# Altium PCB IR Sensors.PcbDoc
Units mm, origin at the board's own origin, x right, y up, seen from the top; angles counter-clockwise.
Board outline 45.75 x 75 mm, 2 copper layers (Top Layer, Bottom Layer); 24 components, 116 nets, 71 pads, 0 vias.
Unrouted connection lines stored in the file: 12.
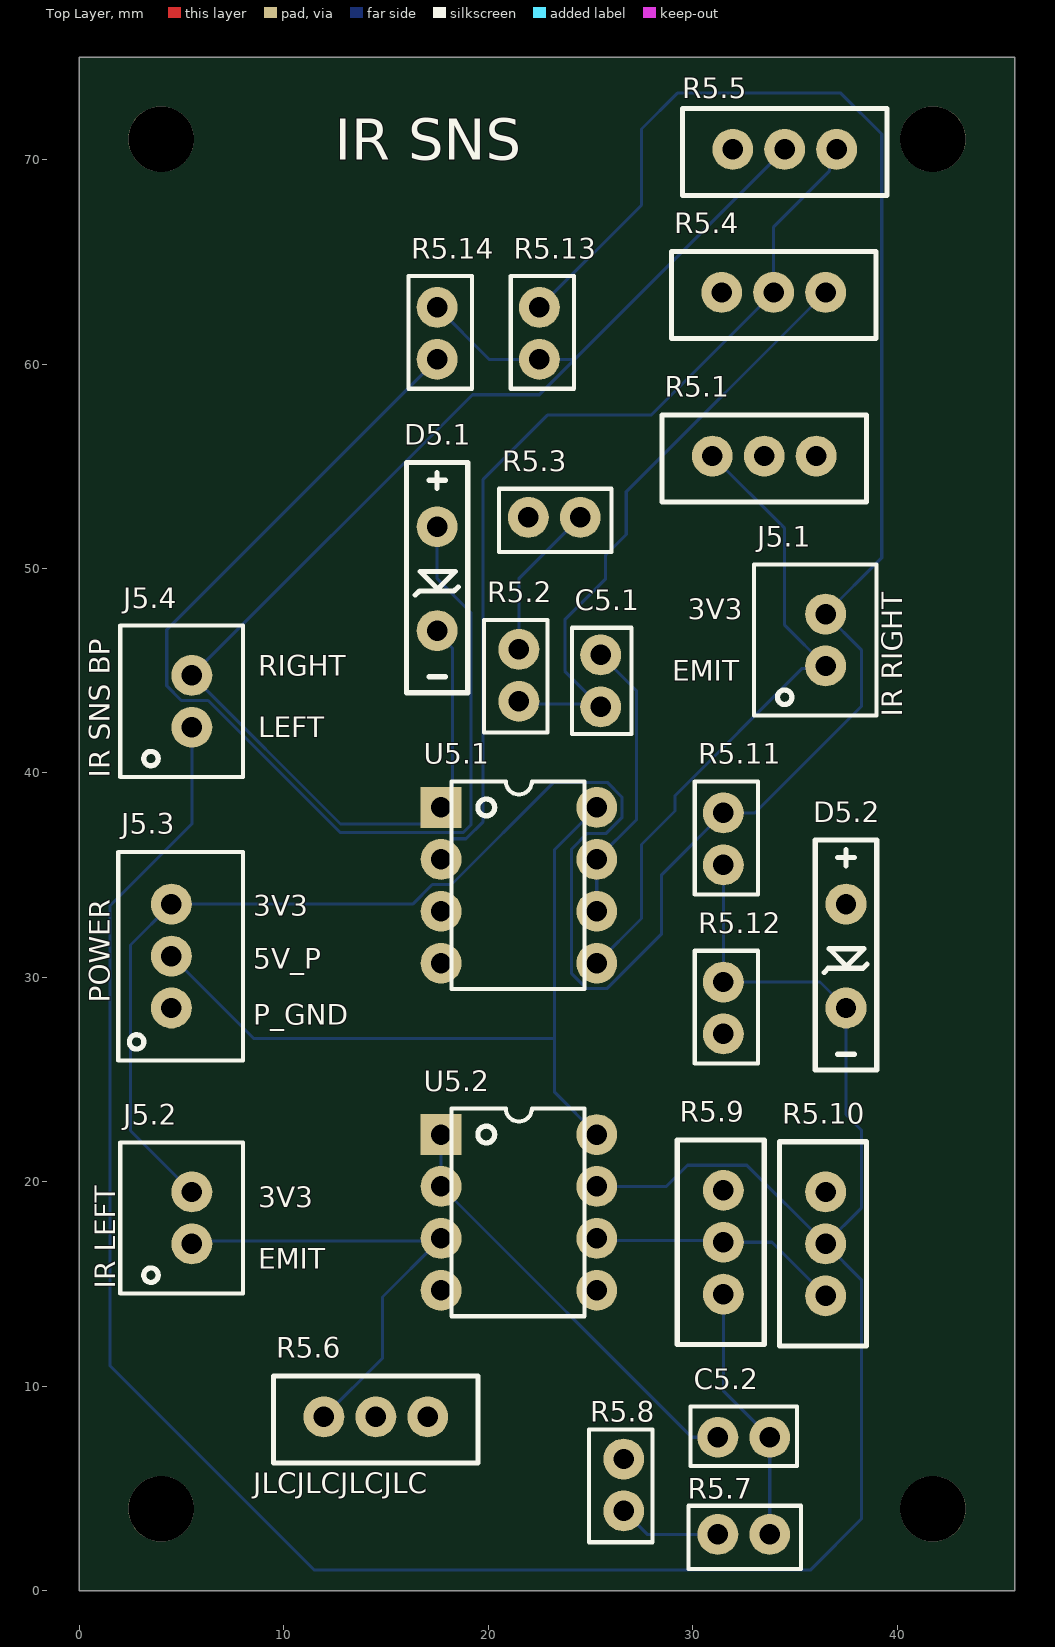
[diagram p0: Top Layer view]
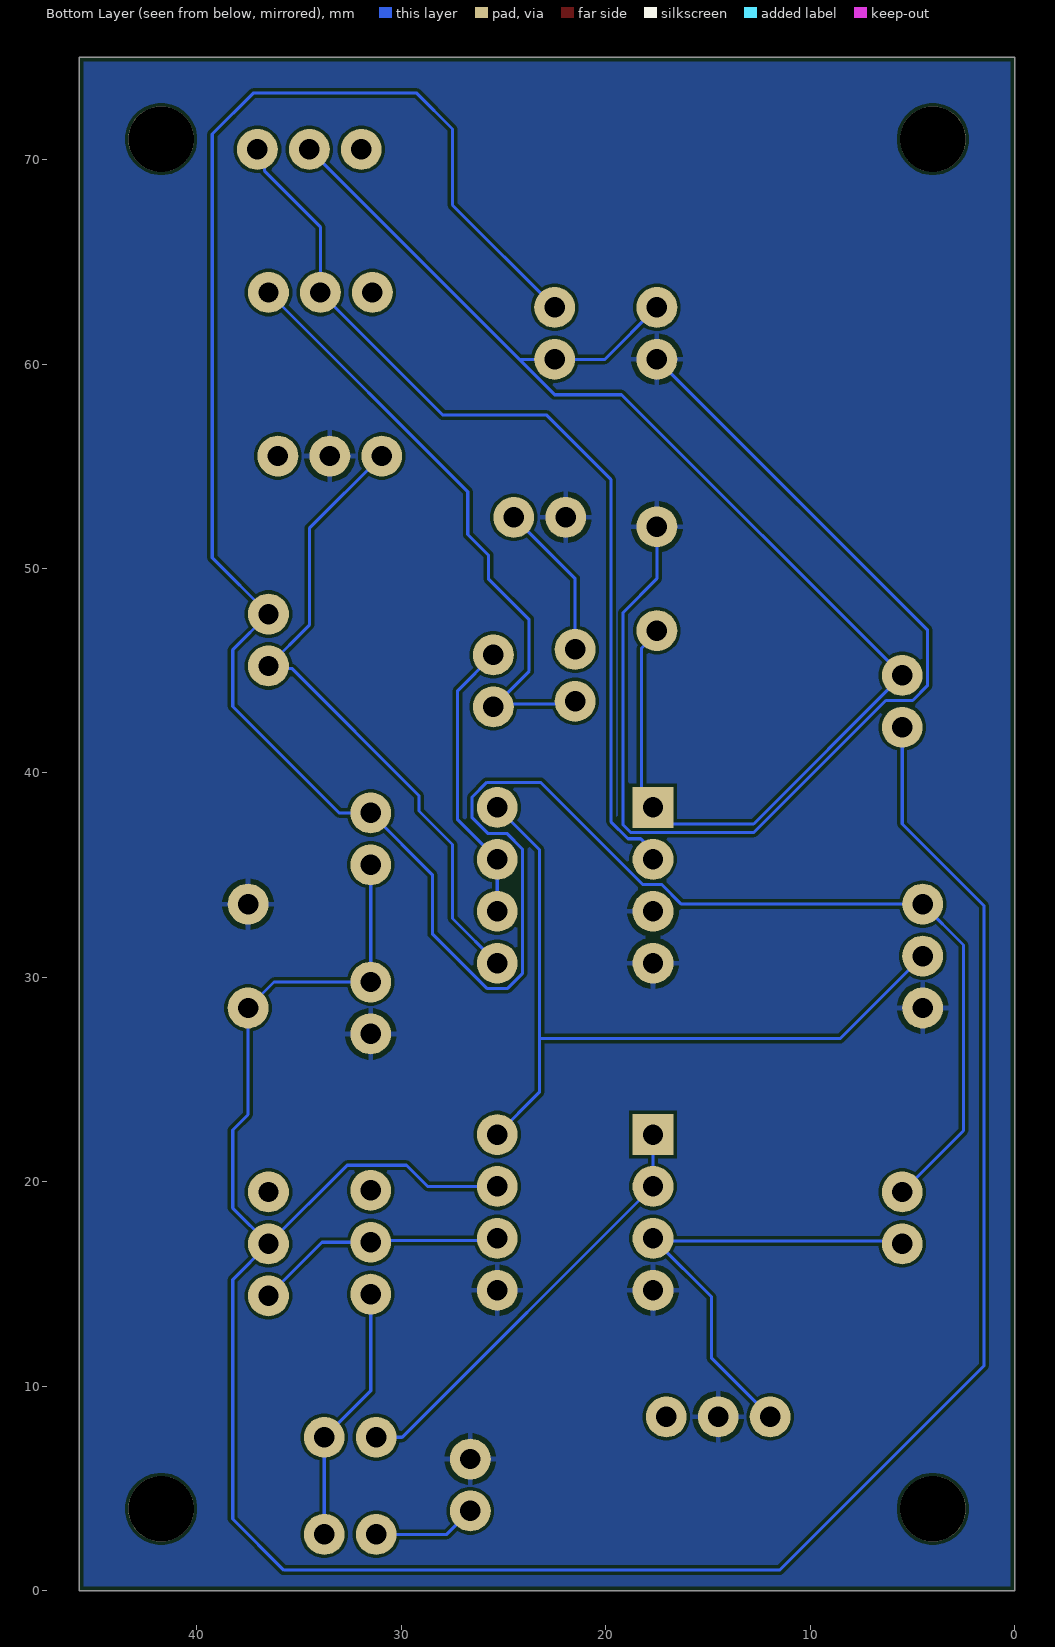
[diagram p1: Bottom Layer view, seen from below]
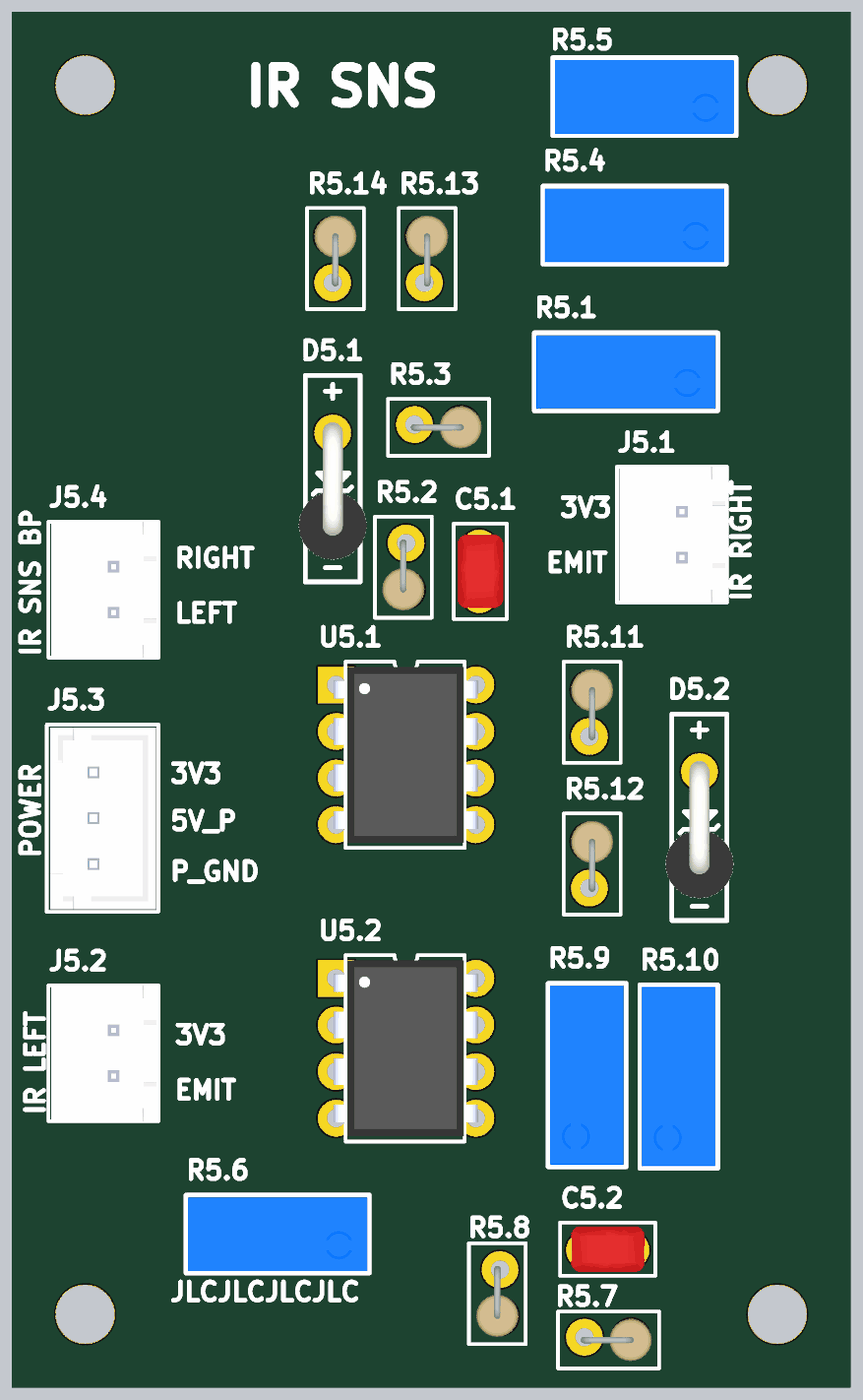
[diagram p2: 3D render of the assembled board from above, using the file's embedded part models]

## Layer stack, top to bottom
Top Solder: solder mask 0.0102, Solder Resist, Dk 3.5
Top Layer: signal copper 0.0356
Dielectric 1: dielectric 0.32, FR-4, Dk 4.8
Bottom Layer: signal copper 0.0356
Bottom Solder: solder mask 0.0102, Solder Resist, Dk 3.5

## Board outline
0,0 0,75 45.75,75 45.75,0

## Design rules (kind name [scope] priority, off if disabled: settings)
BoardOutlineClearance [All] p1: gap=0.2 ignorepadtopadclearanceinfootprint=FALSE
Clearance [All] p1: gap=0.152 ignorepadtopadclearanceinfootprint=FALSE
HoleSize [All] p1: absolutevalues=TRUE maxlimit=100 minlimit=0.4 maxpercent=80.000 minpercent=20.000
PolygonConnect [All] p1: connectstyle=Relief reliefconductorwidth=0.254 reliefentries=4 polygonreliefangle="90 Angle" airgapwidth=0.254
RoutingVias [All] p1: holewidth=0.4 width=0.8 viastyle="Through Hole" minholewidth=0.4 minwidth=0.6 maxholewidth=100 maxwidth=100
SilkToSilkClearance [All] p1: silktosilkclearance=0
SilkToSolderMaskClearance [IsPad] p1: minsilkscreentomaskgap=0 clearancetoexposedcopper=TRUE
SolderMaskExpansion [All] p1: expansion=0.102 istentingtop=FALSE
Width [All] p1: maxlimit=100 minlimit=0.152 preferedwidth=0.152
27 further rules are at their usual default settings.

## Components (designator, comment, footprint, x,y, rotation, side; value= is the part's Value field where it differs from the comment)
C5.1 "470n" "Non Polarized Cap" 25.5,44.5 r270 top
C5.2 "470n" "Non Polarized Cap" 32.5,7.5 r0 top
D5.1 "3.3V" "Zener Generic" 17.5,49.5 r270 top
D5.2 "3.3V" "Zener Generic" 37.5,31.04 r270 top
J5.1 "IR Right" "2pos JST" 36.5,46.5 r90 top
J5.2 "IR Left" "2pos JST" 5.5,18.23 r90 top
J5.3 "Power" "3pos JST" 4.5,31.04 r90 top
J5.4 "IR BP Out" "2pos JST" 5.5,43.5 r90 top
R5.1 "100k" "Pot Generic" 33.5,55.5 r180 top
R5.2 "100" Res_Generic 21.5,44.77 r270 top
R5.3 "100" Res_Generic 23.23,52.5 r0 top
R5.4 "10k" "Pot Generic" 33.96,63.5 r180 top
R5.5 "100k" "Pot Generic" 34.5,70.5 r180 top
R5.6 "100k" "Pot Generic" 14.5,8.5 r180 top
R5.7 "100" Res_Generic 32.5,2.75 r0 top
R5.8 "100" Res_Generic 26.627,5.167 r270 top
R5.9 "10k" "Pot Generic" 31.5,17.04 r90 top
R5.10 "100k" "Pot Generic" 36.5,16.96 r90 top
R5.11 "Res_Generic" Res_Generic 31.5,36.77 r90 top
R5.12 "Res_Generic" Res_Generic 31.5,28.5 r90 top
R5.13 "Res_Generic" Res_Generic 22.5,61.5 r90 top
R5.14 "Res_Generic" Res_Generic 17.5,61.5 r90 top
U5.1 "TL082IP" DIP8 21.5,34.5 r0 top
U5.2 "TL082IP" DIP8 21.5,18.5 r0 top

## Footprints (in the part's own frame and the unit in brackets; to place one, negate y for a bottom-side part, rotate by r counter-clockwise, add the part's x,y. Pads: shape width x height; smd on the part's side, far side on the other; paste and mask are expansions set on the pad)
"2pos JST" [mm]
  round 2 hole 1: 1(-1.27,0) 2(1.27,0)
  silkscreen extent -3.7,-2.5 3.7,3.5, body extent -3.7,-2.4 3.7,3.35, height 7.01
"3pos JST" [mm]
  round 2 hole 1: 1(-2.54,0) 2(0,0) 3(2.54,0)
  silkscreen extent -5.1,-3.5 5.1,2.6, body extent -4.95,-3.35 4.95,2.4, height 7
DIP8 [mm]
  rect 2x2 hole 1: 1(-3.81,3.81)
  round 2 hole 1: 2(-3.81,1.27) 3(-3.81,-1.27) 4(-3.81,-3.81) 5(3.81,-3.81) 6(3.81,-1.27) 7(3.81,1.27) 8(3.81,3.81)
  silkscreen extent -3.3,-5.08 3.2,5.08, body extent -3.96,-4.79 3.91,4.79, height 5.33
"Non Polarized Cap" [mm] "Cap Generic THT"
  round 2 hole 1: 1(-1.27,0) 2(1.27,0)
  silkscreen extent -2.6,-1.4 2.6,1.5, body extent -2,-1.2 2,1.3, height 6
"Pot Generic" [mm]
  round 2 hole 1: 1(-2.54,0) 2(0,0) 3(2.54,0)
  silkscreen extent -5,-2 5,2.25, body extent -4.89,-1.86 4.89,2.15, height 11.41
Res_Generic [mm] "Cap Generic THT Footprint"
  round 2 hole 1: 1(-1.27,0) 2(1.27,0)
  silkscreen extent -2.71,-1.7 2.8,1.4, body extent -1.47,-1.3 2.4,1, height 8.18
"Zener Generic" [mm]
  round 2 hole 1: 1(-2.54,0) 2(2.54,0)
  silkscreen extent -5.68,-1.5 5.58,1.5, body extent -3.12,-1.86 4.37,1.86, height 11.55

## Part data
C5.1 C5.2: library part Cap_Generic
D5.1 D5.2: library part Zener_Generic
J5.1 J5.2 J5.4: library part "2pos Conn", "2pos Conn JST"
J5.3: library part "3pos Conn", "3pos Conn"
R5.1 R5.4 R5.5 R5.6 R5.9 R5.10: library part Pot_Generic
R5.2 R5.3 R5.7 R5.8: library part Res_Generic
U5.1 U5.2: library part "TL082IP Op Amp", "TL082IP IC OPAMP JFET 2 CIRCUIT 8DIP", Supplier Part Number 1=595-TL082IP, Supplier 1=Mouser

## Free pads (board coordinates)
  round 3.2 hole 3.2: ""(4,4) ""(4,71) ""(41.75,4) ""(41.75,71)

## Nets (pads, with @x,y where several pads share a name; then routed paths per layer and width w, separated by ;. In a path a pad name is that pad's centre, name@x,y a point inside that pad or via, vN(x,y) a via of type N, cw(c..) or ccw(c..) an arc to the next point about the centre after c; other vN are vias at no path point)
3.3V_P: J5.1.2 J5.2.2 J5.3.3 R5.11.2 R5.13.2 | length 127
  Bottom Layer w0.152: J5.2.2 2.5,22.5 2.5,31.58 J5.3.3 16.302,33.58 17.264,34.541 18.199,34.541 23.196,39.539 25.819,39.539 26.539,38.819 26.539,37.801 25.777,37.04 24.842,37.04 24.081,36.279 24.081,30.181 24.801,29.461 25.819,29.461 28.483,32.125 28.483,35.023 R5.11.2 33.04,38.04 38.25,43.25 38.25,46.02 J5.1.2 39.25,50.52 39.25,71.25 37.25,73.25 29.25,73.25 27.5,71.5 27.5,67.77 R5.13.2
5V_ARM: 
5V_P: J5.3.2 U5.1.8 U5.2.8 | length 38.1
  Bottom Layer w0.152: J5.3.2 8.54,27 23.25,27 ; U5.2.8 23.25,24.37 23.25,27 ; U5.1.8 23.25,36.25 23.25,27
5V_SERVO: 
8V: 
15V: 
ARM_SERV_BP_OUT: 
ARM_SERV_PWM: 
BOX_SERV_BP_OUT: 
BOX_SERV_PWM: 
BRIDGE_SERV_BP_OUT: 
BRIDGE_SERV_PWM: 
CLAW_SERV_BP_OUT: 
CLAW_SERV_PWM: 
DCLK: 
DIO: 
ECHO_F_M: 
ECHO_S_L: 
ECHO_S_R: 
ECHO_SPARE: 
ENCODER_L_I: 
ENCODER_L_Q: 
ENCODER_R_I: 
ENCODER_R_Q: 
IR_LEFT_TRANS: J5.2.1 R5.6.3 U5.2.3 | length 23.2
  Bottom Layer w0.152: J5.2.1 5.635,17.095 U5.2.3@17.555,17.095 ; R5.6.3 14.825,11.365 14.825,14.365 U5.2.3@17.555,17.095 ; U5.2.3 U5.2.3@17.555,17.095
IR_RIGHT_TRANS: J5.1.1 R5.1.3 U5.1.5 | length 32.3
  Bottom Layer w0.152: U5.1.5 27.5,32.88 27.5,34.938 ; 27.5,34.939 27.5,36.5 29.135,38.135 29.135,38.885 35.361,45.111 36.381,45.111 J5.1.1 34.5,47.23 34.5,51.96 R5.1.3
IR_SNS_LEFT: D5.2.2 J5.4.1 R5.10.2 R5.11.1 R5.12.2 U5.2.7 | length 127
  Bottom Layer w0.152: J5.4.1 5.5,37.5 1.5,33.5 1.5,11 11.5,1 35.75,1 38.25,3.5 38.25,15.21 R5.10.2 ; U5.2.7 28.711,19.77 29.75,20.809 32.651,20.809 R5.10.2 ; R5.11.1 R5.12.2 36.23,29.77 D5.2.2 37.5,23.282 38.25,22.532 38.25,18.71 R5.10.2
IR_SNS_RIGHT: D5.1.2 J5.4.2 R5.5.2 R5.13.1 R5.14.2 U5.1.1 | length 72.2
  Bottom Layer w0.152: D5.1.2 17.5,46.849 18.25,46.099 18.25,38.87 16.88,37.5 12.77,37.5 J5.4.2 19.23,58.5 22.5,58.5 24.23,60.23 ; R5.14.2 20.04,60.23 R5.13.1 24.23,60.23 ; R5.5.2 24.23,60.23
LEFT+: 
LEFT-: 
LEFT_FWD: 
LEFT_FWD_BP_OUT: 
LEFT_REV: 
LEFT_REV_BP_OUT: 
M_GND: 
MAGNET_SNS: 
NetC1.8_2: 
NetC5.1_1: C5.1.1 U5.1.6 U5.1.7 | length 14.1
  Bottom Layer w0.152: U5.1.6 U5.1.7 27.25,37.71 27.25,44.02 C5.1.1
NetC5.1_2: C5.1.2 R5.2.2 R5.4.1 | length 30.2
  Bottom Layer w0.152: R5.2.2 21.635,43.365 C5.1.2@25.365,43.365 ; C5.1.2 C5.1.2@25.365,43.365 ; R5.4.1 26.75,53.75 26.75,51.658 25.729,50.637 25.729,49.473 23.75,47.495 23.75,44.98 C5.1.2@25.365,43.365
NetC5.2_1: C5.2.1 U5.2.1 U5.2.2 | length 21.2
  Bottom Layer w0.152: U5.2.1 U5.2.2 29.96,7.5 C5.2.1
NetC5.2_2: C5.2.2 R5.7.2 R5.9.1 | length 12.7
  Bottom Layer w0.152: R5.9.1 31.5,9.77 C5.2.2 R5.7.2
NetQ2.1_2: 
NetQ2.1_3: 
NetQ2.2_2: 
NetQ2.2_3: 
NetQ2.3_2: 
NetQ2.3_3: 
NetQ2.4_2: 
NetQ2.4_3: 
NetQ3.1_2: 
NetQ3.1_3: 
NetQ3.2_2: 
NetQ3.2_3: 
NetQ3.3_2: 
NetQ3.3_3: 
NetQ3.4_2: 
NetQ3.4_3: 
NetQ3.5_1: 
NetQ3.6_1: 
NetQ3.7_1: 
NetQ3.8_1: 
NetR2.3_2: 
NetR2.6_2: 
NetR2.7_1: 
NetR2.8_1: 
NetR2.13_2: 
NetR2.14_2: 
NetR2.15_2: 
NetR2.16_2: 
NetR3.3_2: 
NetR3.4_1: 
NetR3.5_1: 
NetR3.6_2: 
NetR3.11_2: 
NetR3.12_2: 
NetR3.13_1: 
NetR3.14_2: 
NetR4.11_2: 
NetR4.13_2: 
NetR4.15_2: 
NetR4.17_2: 
NetR4.19_2: 
NetR5.2_1: R5.2.1 R5.3.2 | length 8.5
  Bottom Layer w0.152: R5.2.1@22.053,46.593 R5.2.1 21.5,49.5 R5.3.2
NetR5.4_2: R5.4.2 R5.5.1 U5.1.2 | length 46.1
  Bottom Layer w0.152: U5.1.2 17.69,36.172 18.295,36.777 18.911,36.777 19.75,37.616 19.75,54.36 22.89,57.5 27.96,57.5 R5.4.2 33.96,66.71 36.686,69.436 36.686,70.146 R5.5.1
NetR5.7_1: R5.7.1 R5.8.2 | length 5.1
  Bottom Layer w0.152: R5.8.2 27.774,2.75 R5.7.1
NetR5.9_2: R5.9.2 R5.10.1 U5.2.6 | length 12.4
  Bottom Layer w0.152: U5.2.6 25.405,17.135 31.405,17.135 R5.9.2 33.88,17.04 R5.10.1
P_GND: D5.1.1 D5.2.1 J5.3.1 R5.1.2 R5.3.1 R5.6.2 R5.8.1 R5.12.1 R5.14.1 U5.1.3 U5.1.4 U5.2.4 U5.2.5 | length 54.7
  Bottom Layer w0.152: D5.1.1 17.5,49.5 19.152,47.848 19.152,37.448 18.785,37.081 12.758,37.081 6.298,43.541 4.991,43.541 4.271,44.261 4.271,47.001 R5.14.1
REF_F_L_COL: 
REF_F_L_LED: 
REF_F_L_SNS: 
REF_F_R_COL: 
REF_F_R_LED: 
REF_F_R_SNS: 
REF_R_COL: 
REF_R_LED: 
REF_R_SNS: 
REF_S_L_COL: 
REF_S_L_LED: 
REF_S_L_SNS: 
REF_S_R_COL: 
REF_S_R_LED: 
REF_S_R_SNS: 
RIGHT+: 
RIGHT-: 
RIGHT_FWD: 
RIGHT_FWD_BP_OUT: 
RIGHT_REV: 
RIGHT_REV_BP_OUT: 
SPARE_1: 
SW_CLAW+: 
SW_CLAW_SNS: 
SW_FRONT+: 
SW_FRONT_SNS: 
SW_REAR+: 
SW_REAR_SNS: 
TRIG_COM: 
pads on no net: R5.1.1 R5.4.3 R5.5.3 R5.6.1 R5.9.3 R5.10.3

## Polygon pours and split planes (outlines as drawn)
P_GND on Bottom Layer "GND " (solid, remove dead copper, pour order 0): 0,75 45.75,75 45.75,0 0,0

## Silkscreen, mask and mechanical layers (free items; w line width, h text height)
Top Overlay:
  text "IR SNS" at 12.5,70 h2
  text "3V3" at 29.754,47.504 h1
  text "RIGHT" at 8.754,44.754 h1
  text "EMIT" at 29.004,44.504 h1
  text "IR RIGHT" at 40.246,42.754 h1 r90
  text "LEFT" at 8.754,41.754 h1
  text "IR SNS BP" at 1.496,39.754 h1 r90
  text "3V3" at 8.504,33.004 h1
  text "5V_P" at 8.504,30.421 h1
  text "POWER" at 1.496,28.754 h1 r90
  text "P_GND" at 8.504,27.671 h1
  text "3V3" at 8.754,18.754 h1
  text "EMIT" at 8.754,15.754 h1
  text "IR LEFT" at 1.746,14.754 h1 r90
  text "JLCJLCJLCJLC" at 8.504,4.754 h1
Mechanical 1:
  the board outline again, w0.2